# Altium PCB STM8 Oscillograph.PcbDoc (part 2 of 3)
Units mm, origin at the board's own origin, x right, y up, seen from the top; angles counter-clockwise.
Board outline 26.01 x 35.08 mm, 2 copper layers (Top Layer, Bottom Layer); 152 components, 126 nets, 536 pads, 88 vias.
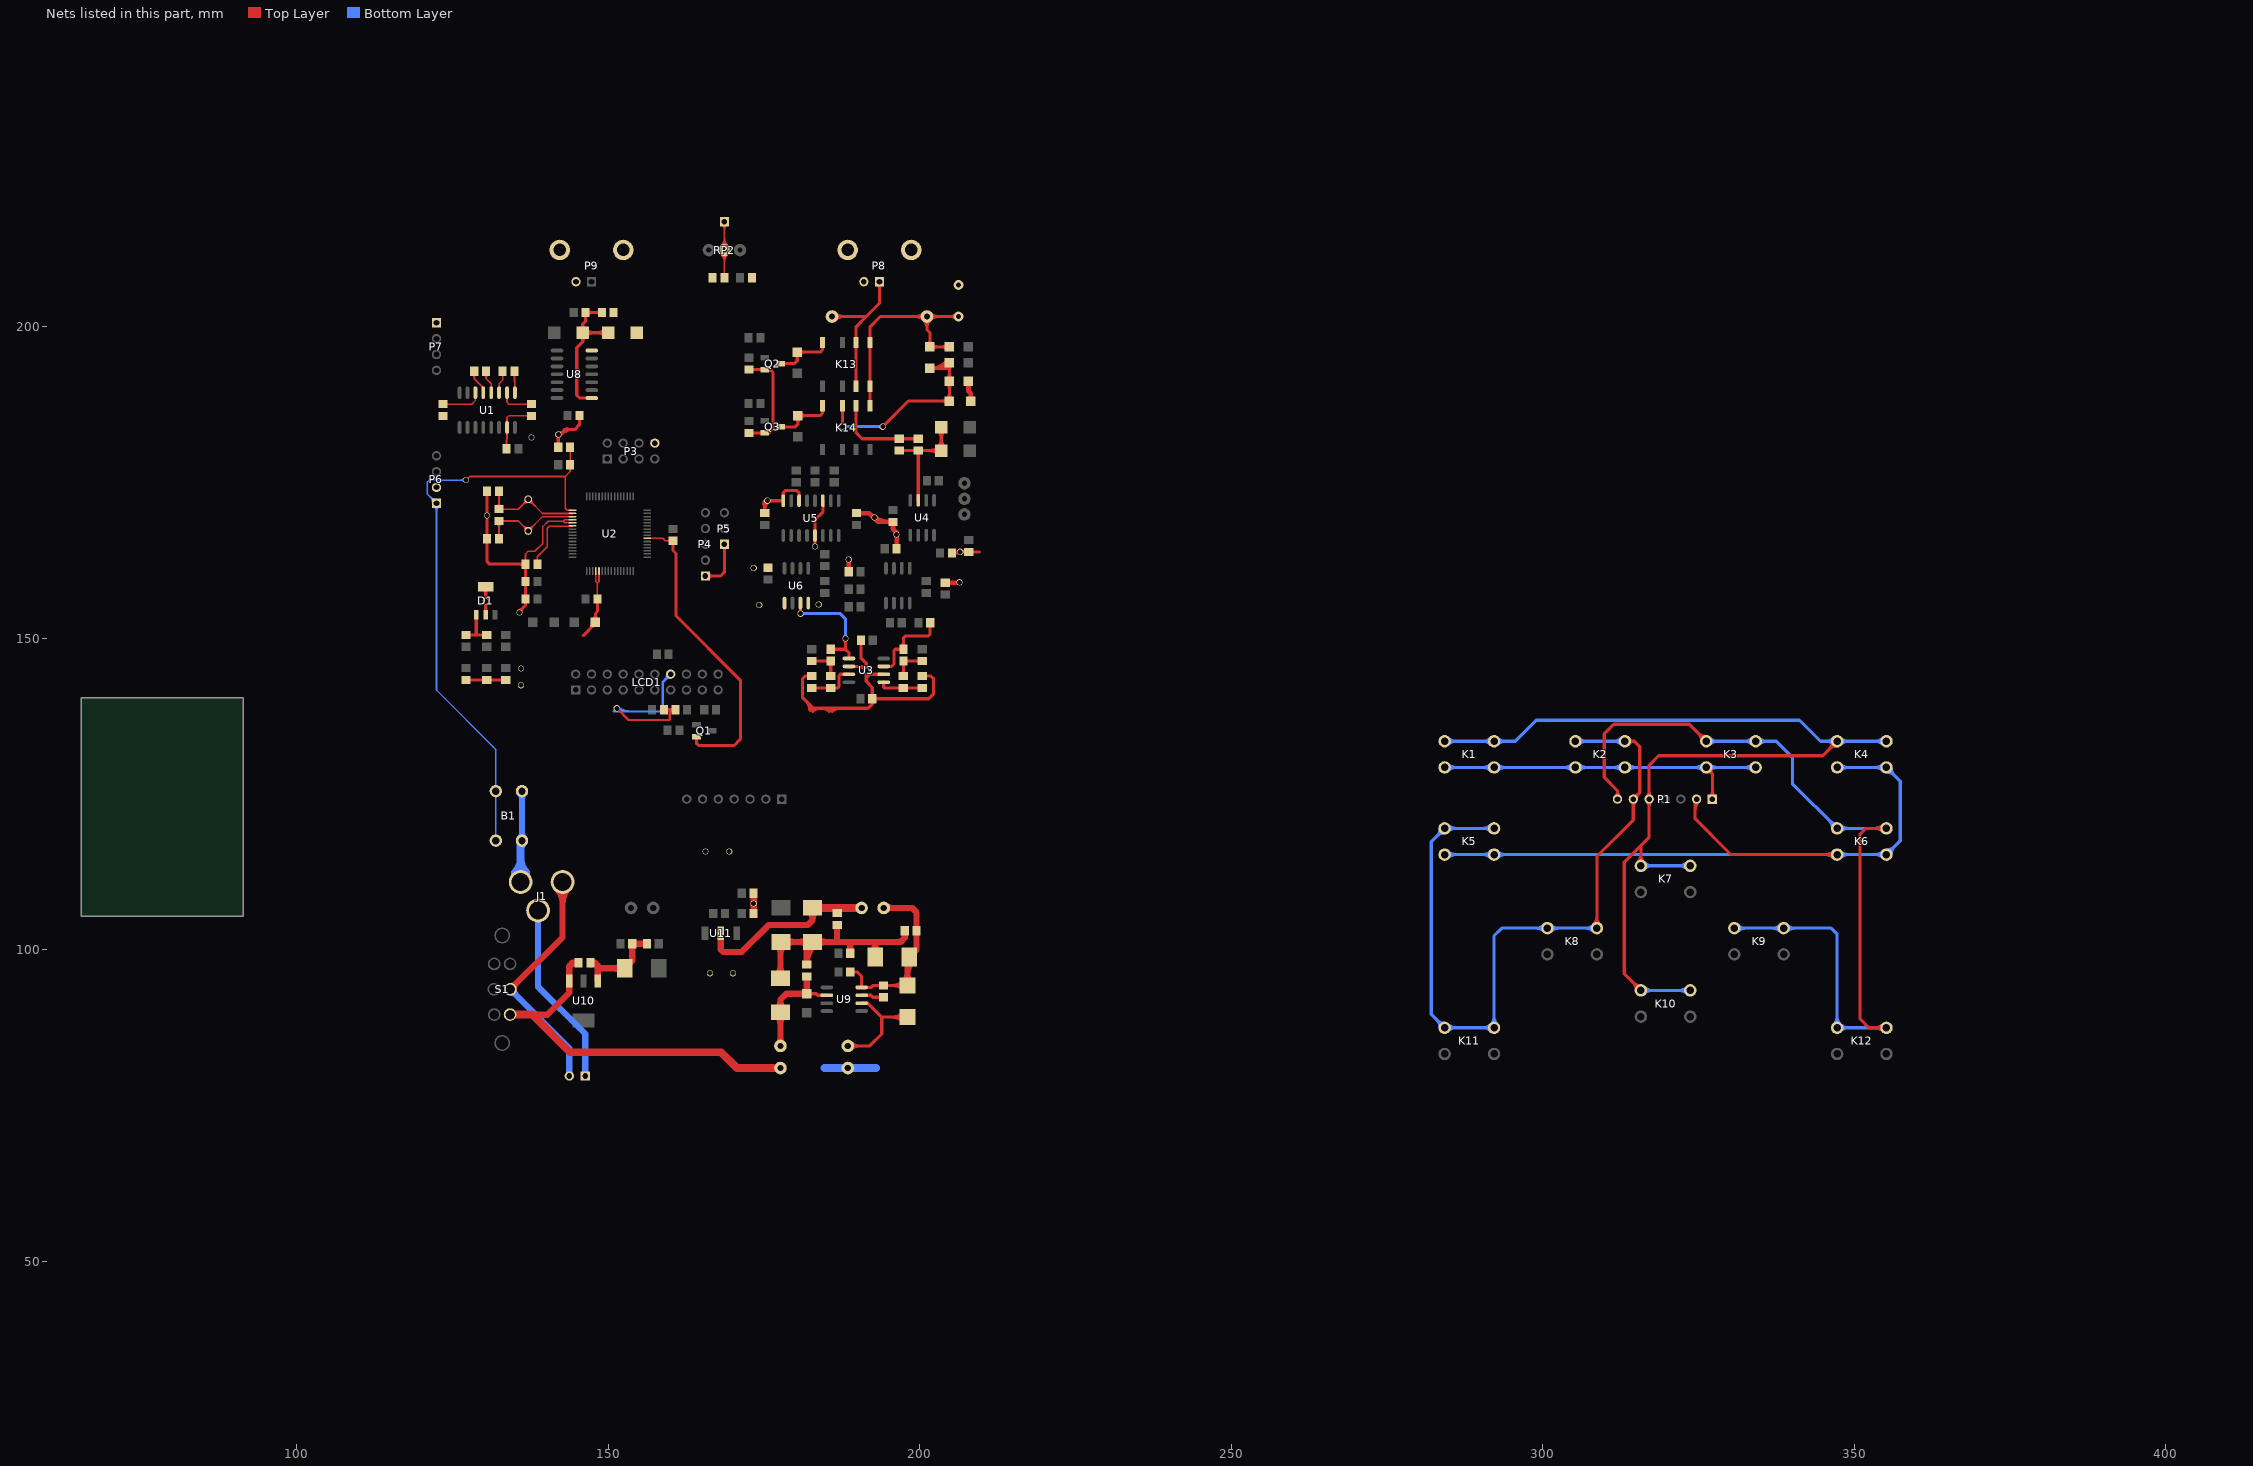
[diagram p2: the nets of this part, all layers, seen from the top]

## Via types
v1: diameter 1, hole 0.8, Top Layer to Bottom Layer, tented both sides, 88 vias

## Nets (pads, with @x,y where several pads share a name; then routed paths per layer and width w, separated by ;. In a path a pad name is that pad's centre, name@x,y a point inside that pad or via, vN(x,y) a via of type N, cw(c..) or ccw(c..) an arc to the next point about the centre after c; other vN are vias at no path point) (continued)
GND: B1.1 B1.4 C1.2 C2.1 C4.1 C5.2 C7.2 C8.2 C9.2 C10.1 C11.2 C12.2 C13.2 C14.2 C15.2 C16.2 C17.1 C18.2 C20.1 C21.1 C22.1 C24.1 C26.1 C27.1 C29.1 C30.1 C31.1 C32.1 C33.1 C34.1 C35.1 C36.2 C37.2 C38.2 C40.2 C41.2 C42.1 C43.2 C44.2 C45.1 C46.2 C47.1 C48.2 C49.1 C50.1 D1.2 D7.1 J1.2 L3.2 LCD1.14 P3.8 P4.1 P5.1 P6.2 P7.1 P8.2 P9.2 Q1.2 Q2.2 Q3.2 R4.2 R12.1 R16.1 R22.1 R28.2 R32.1 R36.1 R37.2 R39.1 R42.1 U1.15 U2.4 U2.5 U2.20 U2.21 U2.39 U3.2 U3.6 U5.3 U5.6 U5.8 U5.13 U6.1 U6.4 U8.7 U10.1 | length 448
  Top Layer w0.254: C7.2@133.67,180.467 133.67,182.006 133.756,182.093 133.756,185.471 134,185.715 C2.1@137.693,185.715 ; C10.1@136.718,161.861 136.718,163.564 137.136,163.982 138.227,163.982 139.522,165.278 139.522,167.97 140.36,168.808 142.773,168.808 ; U2.5@144.272,168.561 143.021,168.561 142.773,168.808 ; U2.4@144.272,169.061 143.026,169.061 142.773,168.808 ; U2.20@148.022,160.811 148.022,159.115 148.27,158.867 ; C12.2@148.27,156.337 148.27,158.867 ; U2.21@148.522,160.811 148.522,159.119 148.27,158.867 ; U2.39@156.272,166.061 158.754,166.061 159.141,165.674 C15.2@160.401,165.674
  Top Layer w0.381: v1@151.384,138.476 cw(c151.384,137.729) 151.912,138.257 cw(c152.441,138.786) v1@151.693,138.786 ; v1(151.384,138.786) 153.264,136.906 159.779,136.906 159.868,136.994 159.868,138.557 ; C18.2@158.938,138.557 C16.2@160.773,138.557 ; C18.2@159.263,138.232 cw(c160.047,137.448) 160.047,138.557 cw(c160.047,139.666) C18.2@159.263,138.882 ; C16.2@160.448,138.232 ccw(c159.664,137.448) 159.664,138.557 ccw(c159.664,139.666) C16.2@160.448,138.882
  Top Layer w0.508: R4.2@127.178,143.337 C1.2@133.528,143.337 ; D1.2@129.968,157.974 cw(c129.101,157.107) 130.327,157.107 cw(c131.554,157.107) D1.2@130.687,157.974 ; v1@130.179,155.782 cw(c129.82,155.423) 130.327,155.423 ; v1@130.179,156.13 ccw(c129.82,156.489) 130.327,156.489 ; D1.2@130.327,153.761 D1.2@130.327,158.333 ; 130.327,155.301 cw(c131.008,155.301) v1@130.527,155.782 ; 130.327,156.611 ccw(c131.008,156.611) v1@130.527,156.13 ; C8.2@130.561,173.609 130.561,162.326 130.962,161.925 C10.1@136.718,161.925 136.718,155.311 135.636,154.229 v1@135.636,154.495 ; v1@135.636,154.475 ccw(c135.636,155.069) 136.056,154.649 ccw(c136.476,154.229) v1@135.882,154.229 ; v1@136.009,154.178 cw(c137.032,154.178) 136.309,154.901 ; C10.1@136.438,161.645 ccw(c135.762,160.969) 135.762,161.925 ccw(c135.762,162.881) C10.1@136.438,162.205 ; v1@141.812,182.579 cw(c141.417,182.184) 141.976,182.184 ; C17.1@141.976,180.67 141.976,182.311 143.18,183.515 144.602,183.515 145.374,184.287 C34.1@145.374,185.776 ; 141.976,182.134 cw(c142.605,182.134) v1@142.16,182.579 ; v1@141.986,182.999 ccw(c141.986,184.635) 143.143,183.478 ; 142.934,183.515 cw(c142.34,183.515) 142.76,183.095 cw(c143.18,182.675) 143.18,183.269 ; 143.354,183.341 cw(c143.774,182.921) 143.774,183.515 cw(c143.774,184.109) 143.354,183.689 ; 145.974,150.444 147.955,152.425 147.955,154 148.27,154.315 C12.2@148.27,156.337 ; 146.951,151.421 ccw(c145.753,152.619) C11.2@147.447,152.619 ; C11.2@147.418,151.889 cw(c147.955,151.352) C11.2@147.955,152.111 ; C11.2@147.596,152.978 ccw(c146.729,153.845) 147.955,153.845 ccw(c149.181,153.845) C11.2@148.314,152.978 ; C15.2@160.401,165.674 160.401,164.109 160.884,163.627 160.884,153.645 171.221,143.307 171.221,133.833 170.205,132.817 164.516,132.817 164.16,133.172 Q1.2@164.16,134.239 ; Q1.2@164.025,134.104 cw(c163.7,133.779) 164.16,133.779 cw(c164.62,133.779) Q1.2@164.295,134.104 ; P4.1@165.608,160.02 168.046,160.02 168.656,160.63 P5.1@168.656,165.1 ; P4.1@165.959,159.669 cw(c166.805,158.823) 166.805,160.02 cw(c166.805,161.217) P4.1@165.959,160.371 ; R22.1@172.593,182.997 175.834,182.997 ; R12.1@172.593,193.157 175.123,193.157 Q2.2@175.133,193.167 175.997,193.167 176.454,192.71 176.454,183.617 175.834,182.997 ; 174.394,182.997 ccw(c174.394,183.492) Q3.2@174.744,183.142 ; 174.394,193.157 ccw(c174.394,193.652) Q2.2@174.744,193.302 ; C49.1@174.853,170.394 ccw(c174.177,171.07) 175.133,171.07 ccw(c176.089,171.07) C49.1@175.413,170.394 ; 174.948,171.889 cw(c175.482,171.355) v1@175.482,172.11 ; 174.959,171.53 cw(c174.539,171.11) 175.133,171.11 cw(c175.727,171.11) 175.307,171.53 cw(c176.708,170.129) 176.708,172.11 ; C49.1@175.133,170.114 175.133,171.704 ; C49.1@175.133,170.535 cw(c177.114,170.535) 175.713,171.936 cw(c176.133,171.517) 176.133,172.11 cw(c176.133,172.704) v1@175.713,172.284 ; 175.133,171.762 cw(c175.888,171.762) v1@175.354,172.296 ; Q3.2@175.133,182.997 Q3.2@175.133,183.007 ; v1@175.139,171.95 ccw(c175.152,172.498) v1(175.539,172.11) ; v1@175.293,172.105 cw(c174.745,172.092) 175.133,171.704 ; v1@175.379,171.71 cw(c175.927,171.723) v1(175.539,172.11) ; Q2.2@175.387,193.484 cw(c175.387,192.779) 175.886,193.278 ; Q2.2@175.472,192.997 cw(c175.794,192.354) 176.301,192.862 ; Q2.2@175.522,193.032 cw(c175.847,192.707) 175.847,193.167 cw(c175.847,193.627) Q2.2@175.522,193.302 ; Q3.2@175.529,183.134 ccw(c175.834,183.404) 175.834,182.997 ; v1@175.534,171.864 ccw(c175.521,171.316) 175.133,171.704 ; U5.6@180.645,172.11 180.645,173.38 180.289,173.736 178.41,173.736 178.105,173.431 U5.8@178.105,172.11 v1(175.539,172.11) ; 181.739,139.977 cw(c180.192,138.43) 182.38,138.43 ; 182.606,139.11 cw(c181.926,138.43) 182.888,138.43 ; C26.1@182.651,143.942 C26.1@182.651,143.952 ; 182.8,138.256 cw(c184.078,136.978) 184.078,138.786 ; C26.1@182.855,143.942 181.635,143.942 181.178,143.485 181.178,140.538 182.931,138.786 191.719,138.786 192.39,139.456 ; v1@183.011,164.918 ccw(c182.591,165.338) 183.185,165.338 ccw(c183.779,165.338) v1@183.359,164.918 ; v1(183.185,164.744) 183.185,169.012 184.455,170.282 U5.3@184.455,172.11 ; 184.272,138.786 cw(c184.272,136.978) 185.551,138.256 ; 185.899,138.256 cw(c187.177,136.978) 187.177,138.786 ; U3.2@188.646,145.517 190.678,145.517 v1@191.414,144.78 ; C21.1@190.566,149.733 190.566,146.873 191.414,146.025 191.414,143.104 192.39,142.128 192.39,139.456 ; 190.879,145.315 ccw(c191.516,145.952) v1@191.516,145.051 ; 191.414,143.688 191.973,144.247 U3.6@194.234,144.247 ; 191.414,143.966 cw(c192.355,143.966) v1@191.69,144.631 ; 191.414,145.645 ccw(c192.355,145.645) v1@191.69,144.979 ; C22.1@192.165,139.883 cw(c191.871,139.456) 192.39,139.456 ; C22.1@192.39,140.31 201.447,140.31 202.235,141.097 202.235,143.535 201.818,143.952 C27.1@200.431,143.952 ; C22.1@192.614,139.883 ccw(c192.908,139.456) 192.39,139.456 ; C22.1@192.67,140.03 cw(c193.346,139.354) 193.346,140.31 cw(c193.346,141.266) C22.1@192.67,140.59 ; C29.1@205.166,163.703 206.273,163.703 206.466,163.896 209.575,163.896 ; C29.1@205.418,163.703 ccw(c205.418,164.991) v1@206.328,164.08 ; C29.1@205.446,163.423 cw(c206.122,162.747) 206.122,163.703 cw(c206.122,164.659) C29.1@205.446,163.983 ; v1@206.676,163.732 cw(c207.071,163.337) 207.071,163.896 ; v1@206.676,164.08 ccw(c207.121,164.525) 207.121,163.896 ; 175.133,171.704 v1(175.539,172.11)
  Top Layer w0.762: R32.1@188.61,160.68 v1(188.61,162.651) ; C50.1@189.865,170.114 191.887,170.114 193.279,168.722 C30.1@195.707,168.722 195.707,167.589 196.301,166.995 C33.1@196.301,164.389 ; 192.254,169.747 ccw(c192.761,170.254) v1@192.761,169.537 ; v1@192.845,169.502 ccw(c194.728,171.386) 194.728,168.722 ; v1@192.88,169.418 ccw(c193.596,169.418) 193.089,168.911 ; 195.872,167.424 cw(c195.123,166.675) v1@196.182,166.675 ; C32.1@204.089,158.938 v1@206.365,158.938 ; R16.1@207.553,191.018 cw(c206.903,190.368) 207.823,190.368 cw(c208.743,190.368) R16.1@208.092,191.018 ; R16.1@207.823,191.287 207.823,189.713 208.204,189.331 C24.1@208.204,188.112 ; C24.1@207.935,188.381 ccw(c207.284,189.032) 208.204,189.032 ccw(c209.124,189.032) C24.1@208.474,188.381
  Top Layer w1.016: C38.2@147.127,97.917 147.879,97.917 148.336,97.46 U10.1@148.336,94.996 ; C38.2@147.187,97.688 cw(c147.605,96.791) 148.305,97.491 ; 148.387,97.028 C40.2@152.651,97.028 153.858,98.235 C44.2@153.858,100.965 C41.2@156.215,100.965 ; C40.2@152.126,96.503 ccw(c150.86,95.237) 150.86,97.028 ccw(c150.86,98.819) C40.2@152.126,97.553 ; R42.1@173.34,105.842 C48.2@173.34,109.093 ; C36.2@177.123,95.955 ccw(c175.856,97.222) 177.648,97.222 ccw(c179.439,97.222) C36.2@178.172,95.955 ; C47.1@177.199,100.745 cw(c176.116,99.662) 177.648,99.662 ; C36.2@177.648,95.431 C47.1@177.648,101.194 ; 177.648,99.294 cw(c179.699,99.294) C47.1@178.248,100.745 ; C47.1@177.724,101.27 C45.1@182.804,101.27 196.926,101.27 197.602,101.945 C43.2@197.602,103.048 ; C47.1@178.498,100.745 cw(c179.765,99.478) 179.765,101.27 cw(c179.765,103.061) C47.1@178.498,101.794 ; 180.762,101.27 ccw(c180.762,103.062) C45.1@182.029,101.795 ; 180.763,101.27 cw(c180.763,99.479) C45.1@182.029,100.745 ; C37.2@181.864,97.648 C45.1@181.864,100.33 ; C37.2@181.864,97.813 cw(c186.011,97.813) C45.1@183.079,100.745 ; C45.1@183.579,100.745 cw(c184.845,99.479) 184.845,101.27 cw(c184.845,103.061) C45.1@183.579,101.795 ; 186.741,101.346 C46.2@186.741,104.003 ; 188.773,101.27 188.859,101.184 R39.1@188.859,99.441 ; C42.1@192.312,99.631 ccw(c191.045,100.898) 192.837,100.898 ccw(c194.628,100.898) C42.1@193.361,99.631 ; C42.1@192.837,98.857 192.837,101.245
  Bottom Layer w0.381: 150.876,138.278 158.318,138.278 158.775,138.735 158.775,143.027 LCD1.14@160.02,144.272 LCD1.14@159.868,144.272 ; v1@151.064,138.466 ccw(c151.518,138.92) 151.518,138.278 ; v1@151.333,138.735 ccw(c152.438,139.839) 152.438,138.278 ; v1@151.603,139.004 ccw(c153.358,140.759) 153.358,138.278 ; LCD1.14@159.461,144.272 cw(c158.11,144.272) 159.065,143.317 cw(c160.02,142.362) LCD1.14@160.02,143.713
  Bottom Layer w1.016: B1.4@135.812,117.894 ccw(c134.972,118.734) 136.16,118.734 ccw(c137.348,118.734) B1.4@136.508,117.894 ; B1.1@135.812,125.128 cw(c134.972,124.288) 136.16,124.288 cw(c137.348,124.288) B1.1@136.508,125.128 ; B1.4@136.16,117.546 B1.1@136.16,125.476
  Bottom Layer w1.27: J1.2@135.043,112.429 ccw(c132.875,114.597) 135.941,114.597 ccw(c139.007,114.597) J1.2@136.839,112.429 ; J1.2@135.941,110.896 135.941,117.327 B1.4@136.16,117.546 ; 135.941,116.136 cw(c137.57,116.136) B1.4@136.418,117.288 ; 184.734,81.026 192.989,81.026
  other v1: 166.319,96.266 170.028,96.266 173.355,107.442 165.608,115.773 169.418,115.773 136,142.494 191.516,144.805 136,145.161 135.763,154.178 174.244,155.346 183.794,155.448 130.353,155.956 206.375,159.004 173.355,161.29 206.502,163.906 196.301,166.675 192.761,169.418 130.561,169.723 137.668,182.245 141.986,182.753
NetB1_2: B1.2 B1.3 C17.2 P6.1 R6.2 U2.1 | length 106.3
  Top Layer w0.254: v1(127.178,175.412) 127.762,175.997 143.104,175.997 ; R6.2@143.575,177.348 cw(c143.167,176.769) 143.876,176.769 ; C17.2@143.876,180.67 143.876,176.769 ; R6.2@144.177,177.348 ccw(c144.584,176.769) 143.876,176.769 ; U2.1@144.272,170.561 143.434,170.561 143.104,170.891 143.104,175.997 ; 143.104,175.997 143.876,176.769
  Bottom Layer w0.254: P6.1@121.805,171.704 ccw(c120.301,171.704) 121.364,172.768 ccw(c122.428,173.831) P6.1@122.428,172.327 ; P6.1@121.987,171.263 cw(c120.924,170.2) 122.428,170.2 cw(c123.932,170.2) P6.1@122.869,171.263 ; P6.1@122.059,171.704 ccw(c121.168,171.704) 121.798,172.334 ccw(c122.428,172.964) P6.1@122.428,172.073 ; P6.1@122.167,171.443 cw(c121.537,170.813) 122.428,170.813 cw(c123.319,170.813) P6.1@122.689,171.443 ; v1@126.914,175.149 ccw(c126.277,174.512) 126.277,175.412 ccw(c126.277,176.313) v1@126.914,175.676 ; v1(127.178,175.412) 121.285,175.412 120.98,175.108 120.98,173.152 P6.1@122.428,171.704 122.428,141.707 131.953,132.182 B1.3@131.953,117.546
NetC2_2: C2.2 U1.2 | length 5.6
  Top Layer w0.254: U1.2@133.756,189.459 133.756,187.909 134.051,187.615 C2.2@137.693,187.615
NetC3_1: C3.1 U1.1 | length 3.5
  Top Layer w0.254: C3.1@134.96,192.888 134.96,191.252 135.026,191.186 U1.1@135.026,189.459
NetC3_2: C3.2 U1.3 | length 3.7
  Top Layer w0.254: U1.3@132.486,189.459 132.486,190.932 133.06,191.506 C3.2@133.06,192.888
NetC4_2: C4.2 U1.6 | length 6.7
  Top Layer w0.254: C4.2@123.469,187.615 128.077,187.615 128.676,188.214 U1.6@128.676,189.459
NetC6_1: C6.1 U1.4 | length 5.3
  Top Layer w0.254: C6.1@130.065,192.377 cw(c129.538,191.709) 130.388,191.709 ; C6.1@130.388,192.888 130.388,191.709 ; C6.1@130.712,192.377 ccw(c131.239,191.709) 130.388,191.709 ; U1.4@131.216,189.459 131.216,190.881 130.388,191.709
NetC6_2: C6.2 U1.5 | length 5.6
  Top Layer w0.254: C6.2@128.163,192.378 cw(c127.627,191.704) 128.488,191.704 ; C6.2@128.488,192.888 128.488,191.704 ; C6.2@128.814,192.378 ccw(c129.349,191.704) 128.488,191.704 ; U1.5@129.946,189.459 129.946,190.246 128.488,191.704
NetC8_1: C8.1 R5.2 U2.2 X1.2 | length 22.1
  Top Layer w0.254: R5.2@132.091,171.119 ccw(c131.198,172.012) 132.461,172.012 ccw(c133.724,172.012) R5.2@132.831,171.119 ; C8.1@132.461,173.609 R5.2@132.461,170.749 135.57,170.749 X1.2@137.16,172.339 139.438,170.061 U2.2@144.272,170.061 ; X1.2@136.652,172.339 cw(c135.426,172.339) 136.293,171.472 cw(c137.16,170.605) 137.16,171.831 cw(c137.16,170.605) 138.027,171.472 cw(c138.894,172.339) X1.2@137.668,172.339
NetC9_1: C9.1 R5.1 U2.3 X1.1 | length 22.1
  Top Layer w0.254: R5.1@132.091,168.479 cw(c131.198,167.586) 132.461,167.586 cw(c133.724,167.586) R5.1@132.831,168.479 ; C9.1@132.461,165.989 R5.1@132.461,168.849 135.57,168.849 X1.1@137.16,167.259 139.462,169.561 U2.3@144.272,169.561 ; X1.1@136.652,167.259 ccw(c135.426,167.259) 136.293,168.126 ccw(c137.16,168.993) 137.16,167.767 ccw(c137.16,168.993) 138.027,168.126 ccw(c138.894,167.259) X1.1@137.668,167.259
NetC10_2: C10.2 U2.6 | length 10.6
  Top Layer w0.254: C10.2@138.618,161.925 138.618,163.129 140.208,164.719 140.208,167.691 140.538,168.021 144.232,168.021 U2.6@144.272,168.061
NetC19_1: C19.1 K13.3 K13.6 P8.1 | length 28.6
  Top Layer w0.508: C19.1@185.928,201.676 191.44,201.676 ; C19.1@186.467,201.137 cw(c187.768,199.836) 187.768,201.676 cw(c187.768,203.516) C19.1@186.467,202.215 ; K13.3@189.804,190.5 K13.6@189.804,197.5 189.804,200.04 191.44,201.676 ; P8.1@193.197,206.913 cw(c192.351,206.067) 193.548,206.067 cw(c194.745,206.067) P8.1@193.899,206.913 ; P8.1@193.548,207.264 193.548,203.784 191.44,201.676
NetC19_2: C19.2 C20.2 K13.4 K13.5 K14.5 R14.2 VC1.2 | length 55.4
  Top Layer w0.508: K13.4@192.004,190.5 K14.5@192.004,187.34 K13.5@192.004,197.5 192.004,199.98 193.7,201.676 C19.2@201.168,201.676 ; C19.2@200.629,202.215 cw(c199.328,203.516) 199.328,201.676 cw(c199.328,199.836) 200.629,201.137 cw(c199.328,199.836) 201.168,199.836 cw(c203.008,199.836) 201.707,201.137 cw(c203.008,199.836) 203.008,201.676 cw(c203.008,203.516) C19.2@201.707,202.215 ; VC1.2@201.292,197.158 ccw(c200.425,198.025) 201.651,198.025 ccw(c202.877,198.025) 202.01,197.158 ccw(c202.877,198.025) 202.877,196.799 ccw(c202.878,195.573) VC1.2@202.01,196.44 ; R14.2@204.416,196.44 ccw(c203.548,195.573) 203.548,196.799 ccw(c203.548,198.026) R14.2@204.416,197.158 ; R14.2@204.775,196.799 VC1.2@201.651,196.799 201.651,199.059 201.168,199.542 C19.2@201.168,201.676 ; C20.2@205.871,201.299 ccw(c204.96,200.388) 204.96,201.676 ccw(c204.96,202.964) C20.2@205.871,202.053 ; C20.2@206.248,201.676 C19.2@201.168,201.676
NetC23_1: C23.1 R11.2 U3.7 | length 15.2
  Top Layer w0.508: U3.7@194.234,145.517 195.504,145.517 195.885,145.898 195.885,148.057 196.098,148.27 C23.1@197.383,148.27 197.383,150.038 197.714,150.368 201.346,150.368 201.676,150.698 201.676,152.507 R11.2@201.696,152.527 ; C23.1@197.103,148.65 ccw(c196.427,149.326) 197.383,149.326 ccw(c198.339,149.326) C23.1@197.663,148.65
NetC23_2: C23.2 R18.2 R20.1 | length 7
  Top Layer w0.508: R18.2@197.103,144.232 ccw(c196.427,144.908) 197.383,144.908 ccw(c198.339,144.908) R18.2@197.663,144.232 ; R18.2@197.383,143.952 C23.2@197.383,146.37 R20.1@200.431,146.37
NetC24_2: C24.2 K14.7 R15.1 R16.2 VC1.1 | length 53.5
  Top Layer w0.508: v1@187.43,184.172 ccw(c187.01,184.592) 187.604,184.592 ccw(c188.198,184.592) v1@187.778,184.172 ; v1(187.604,183.998) K14.7@187.604,187.34 ; v1(194.082,183.998) 198.196,188.112 C24.2@204.775,188.112 R15.1@204.775,194.259 cw(c202.787,196.037) 202.787,193.37 ; v1@194.082,184.244 ccw(c194.082,184.837) 194.502,184.418 ccw(c194.922,183.998) v1@194.328,183.998 ; VC1.1@202.01,193.011 cw(c202.877,192.144) 202.877,193.37 cw(c202.877,194.596) VC1.1@202.01,193.729 ; 203.548,188.112 cw(c203.548,186.885) C24.2@204.416,187.753 ; 203.55,188.112 ccw(c203.55,189.337) 204.416,188.471 ccw(c203.55,189.337) 204.775,189.337 ; 203.923,193.37 ccw(c203.923,195.021) R15.1@205.153,193.921 ; R15.1@204.396,194.598 cw(c201.651,197.052) VC1.1@201.651,193.37 204.724,193.37 ; R16.2@204.416,190.928 cw(c203.548,190.061) 204.775,190.061 cw(c206.001,190.061) R16.2@205.134,190.928 ; R16.2@204.416,191.647 ccw(c203.548,192.514) 204.775,192.514 ccw(c206.001,192.514) R16.2@205.134,191.647 ; R15.1@204.416,193.9 cw(c203.548,193.033) 204.775,193.033 cw(c206.001,193.033) R15.1@205.134,193.9 ; 204.775,189.339 ccw(c206.003,189.339) C24.2@205.134,188.471
  Bottom Layer w0.508: v1(187.604,183.998) v1(194.082,183.998) ; v1@187.778,183.824 cw(c188.198,183.404) 188.198,183.998 cw(c188.198,184.592) v1@187.778,184.172 ; v1@193.908,183.824 ccw(c193.488,183.404) 193.488,183.998 ccw(c193.488,184.592) v1@193.908,184.172
NetC25_1: C25.1 U3.1 U6.3 | length 21.9
  Top Layer w0.508: v1@180.674,154.149 ccw(c180.254,154.569) 180.848,154.569 ccw(c181.442,154.569) v1@181.022,154.149 ; v1(180.848,153.975) U6.3@180.848,155.677 ; C25.1@185.724,148.27 188.072,148.27 ; v1@187.898,149.798 cw(c187.478,149.378) 188.072,149.378 cw(c188.666,149.378) v1@188.246,149.798 ; v1(188.072,149.972) 188.072,148.27 ; U3.1@188.646,146.787 188.646,147.696 188.072,148.27
  Bottom Layer w0.508: v1(180.848,153.975) 187.249,153.975 188.072,153.152 v1(188.072,149.972) ; v1@181.022,153.801 cw(c181.442,153.381) 181.442,153.975 cw(c181.442,154.569) v1@181.022,154.149 ; v1@187.898,150.146 ccw(c187.478,150.566) 188.072,150.566 ccw(c188.666,150.566) v1@188.246,150.146
NetC25_2: C25.2 R17.2 R19.1 | length 7
  Top Layer w0.508: R19.1@182.651,146.37 C25.2@185.724,146.37 R17.2@185.724,143.952 ; C25.2@185.444,145.99 cw(c184.768,145.314) 185.724,145.314 cw(c186.68,145.314) C25.2@186.004,145.99
NetC26_2: C26.2 R17.1 U3.3 | length 7.9
  Top Layer w0.508: C26.2@182.651,142.052 R17.1@185.724,142.052 186.832,142.052 187.046,142.265 187.046,144.043 187.249,144.247 U3.3@188.646,144.247
NetC27_2: C27.2 R18.1 U3.5 | length 7.1
  Top Layer w0.508: U3.5@194.234,142.977 194.234,142.113 194.295,142.052 R18.1@197.383,142.052 C27.2@200.431,142.052
NetC28_1: C28.1 D4.1 D5.2 R21.1 U4.3 | length 28.6
  Top Layer w0.508: C28.1@196.723,180.152 R21.1@199.771,180.152 ; R21.1@199.491,179.872 cw(c198.815,179.196) 199.771,179.196 cw(c200.727,179.196) R21.1@200.051,179.872 ; U4.3@199.771,172.161 R21.1@199.771,180.152 ; D4.1@202.915,179.613 ccw(c201.614,178.312) 201.614,180.152 ccw(c201.614,181.992) 202.915,180.691 ccw(c201.614,181.992) 203.454,181.992 ccw(c205.294,181.992) D4.1@203.993,180.691 ; D5.2@202.915,183.357 cw(c201.614,182.056) 203.454,182.056 cw(c205.294,182.056) D5.2@203.993,183.357 ; D5.2@203.454,183.896 D4.1@203.454,180.152 R21.1@199.771,180.152
NetC28_2: C28.2 K14.6 R21.2 | length 14.7
  Top Layer w0.508: K14.6@189.804,187.34 189.804,182.992 190.744,182.052 C28.2@196.723,182.052 R21.2@199.771,182.052
NetC35_2: C35.2 P10.1 RP2.2 | length 24.1
  Top Layer w0.254: RP2.2@168.039,211.727 cw(c166.548,210.236) 168.656,210.236 cw(c170.764,210.236) RP2.2@169.273,211.727 ; RP2.2@168.039,212.961 ccw(c166.548,214.452) 168.656,214.452 ccw(c170.764,214.452) RP2.2@169.273,212.961 ; P10.1@168.215,216.475 cw(c167.152,215.412) 168.656,215.412 cw(c170.16,215.412) P10.1@169.097,216.475 ; RP2.2@168.218,211.906 cw(c167.162,210.85) 168.656,210.85 cw(c170.15,210.85) RP2.2@169.094,211.906 ; RP2.2@168.218,212.782 ccw(c167.162,213.838) 168.656,213.838 ccw(c170.15,213.838) RP2.2@169.094,212.782 ; P10.1@168.395,216.655 cw(c167.765,216.025) 168.656,216.025 cw(c169.547,216.025) P10.1@168.917,216.655 ; C35.2@168.656,207.899 P10.1@168.656,216.916
NetC36_1: C36.1 C37.1 L2.2 R38.1 U9.6 | length 27.6
  Top Layer w0.508: R38.1@181.864,92.964 183.388,92.964 183.642,92.71 U9.6@185.09,92.71 ; R38.1@182.223,92.605 cw(c183.09,91.738) 183.09,92.964 cw(c183.09,94.19) R38.1@182.223,93.323
  Top Layer w1.016: C36.1@177.123,89.442 cw(c175.855,88.174) 177.648,88.174 ; C36.1@177.123,90.491 ccw(c175.855,91.759) 177.648,91.759 ; L2.2@177.289,84.941 ccw(c176.422,85.808) 177.648,85.808 ccw(c178.874,85.808) L2.2@178.007,84.941 ; L2.2@177.648,84.582 177.648,91.999 178.613,92.964 R38.1@181.864,92.964 C37.1@181.864,95.748 ; 177.648,88.176 cw(c179.438,88.176) C36.1@178.172,89.442 ; 177.648,91.757 ccw(c179.438,91.757) C36.1@178.172,90.491
NetC38_1: C38.1 L2.1 S1.3 U10.3 | length 61.8
  Top Layer w1.016: 137.795,89.611 140.208,89.611 143.736,93.139 143.736,97.381 144.272,97.917 C38.1@145.227,97.917 ; 143.795,97.44 cw(c144.772,96.462) C38.1@145.185,97.781
  Top Layer w1.27: S1.3@134.239,89.611 137.795,89.611 143.84,83.566 168.123,83.566 170.663,81.026 L2.1@177.648,81.026
NetC39_1: C39.1 U9.3 | length 3.6
  Top Layer w0.508: U9.3@190.678,92.71 192.151,92.71 192.466,92.395 C39.1@194.183,92.395
NetC39_2: C39.2 C42.2 C43.1 D8.1 L5.1 R40.2 U9.4 | length 41.5
  Top Layer w0.508: R40.2@188.859,96.444 189.967,96.444 190.678,95.733 U9.4@190.678,93.98 192.227,93.98 192.542,94.295 D8.1@198.034,94.295 ; R40.2@189.139,96.164 cw(c189.815,95.488) 189.815,96.444 cw(c189.815,97.4) R40.2@189.139,96.724 ; 195.566,94.295 cw(c195.566,91.807) D8.1@197.325,93.566 ; 195.616,94.295 ccw(c195.616,96.713) D8.1@197.325,95.003
  Top Layer w1.016: L5.1@194.234,106.734 198.777,106.734 199.502,106.009 199.502,100.058 198.034,98.59 D8.1@198.034,94.295 ; L5.1@194.593,106.375 cw(c195.46,105.508) 195.46,106.734 cw(c195.46,107.96) L5.1@194.593,107.093 ; D8.1@197.505,94.824 ccw(c196.229,96.1) 198.034,96.1 ; 198.034,96.149 ccw(c199.908,96.149) D8.1@198.583,94.824 ; 198.034,96.17 cw(c200.737,96.17) C42.2@198.825,98.082
NetC45_2: C45.2 C46.1 L5.2 U11.2 | length 35.4
  Top Layer w1.016: U11.2@168.071,102.692 168.071,100.051 168.453,99.67 171.425,99.67 175.743,103.988 182.042,103.988 182.804,104.75 C45.2@182.804,106.734 ; C45.2@182.279,106.209 cw(c181.013,104.943) 182.804,104.943 cw(c184.595,104.943) C45.2@183.329,106.209
  Top Layer w1.27: C45.2@182.804,106.734 L5.2@190.678,106.734 ; C45.2@183.489,106.299 cw(c184.539,105.249) 184.539,106.734 cw(c184.539,108.219) C45.2@183.489,107.169 ; C46.1@186.741,105.903 186.741,106.709
NetD1_1: D1.1 R2.2 R3.1 | length 6.4
  Top Layer w0.508: R3.1@127.178,150.571 R2.2@130.48,150.571 ; 128.827,150.621 D1.1@128.827,153.761
NetD2_1: D2.1 K13.8 Q2.3 | length 14.2
  Top Layer w0.508: Q2.3@177.673,194.119 179.87,194.119 180.34,194.589 D2.1@180.34,195.961 184.048,195.961 184.404,196.317 K13.8@184.404,197.5 ; Q2.3@178.062,193.985 cw(c178.387,193.66) 178.387,194.119 cw(c178.387,194.579) Q2.3@178.062,194.254 ; D2.1@179.981,195.602 cw(c179.114,194.735) 180.34,194.735 cw(c181.566,194.735) 180.699,195.602 cw(c181.566,194.735) 181.566,195.961 cw(c181.566,197.187) D2.1@180.699,196.32
NetD3_1: D3.1 K14.8 Q3.3 | length 14.2
  Top Layer w0.508: Q3.3@177.673,183.959 180.022,183.959 180.442,184.379 D3.1@180.442,185.776 184.023,185.776 184.404,186.157 K14.8@184.404,187.34 ; Q3.3@178.062,183.825 cw(c178.387,183.5) 178.387,183.959 cw(c178.387,184.419) Q3.3@178.062,184.094 ; D3.1@180.082,185.416 cw(c179.215,184.549) 180.442,184.549 cw(c181.668,184.549) 180.801,185.416 cw(c181.668,184.549) 181.668,185.776 cw(c181.668,187.002) D3.1@180.801,186.135
NetD6_1: D6.1 D7.2 R35.2 R36.2 U8.1 | length 35.6
  Top Layer w0.508: D6.1@145.501,198.425 cw(c144.977,197.637) 145.923,197.637 ; D6.1@145.501,199.694 ccw(c144.977,200.482) 145.923,200.482 ; D6.1@145.923,199.06 D7.2@149.987,199.06 ; D6.1@146.345,198.425 ccw(c146.869,197.637) 145.923,197.637 ; D6.1@146.345,199.694 cw(c146.869,200.482) 145.923,200.482 ; D6.1@146.462,198.521 cw(c147.763,197.22) 147.763,199.06 cw(c147.763,200.899) D6.1@146.462,199.599 ; R35.2@146.645,202.031 cw(c147.321,201.355) 147.321,202.311 cw(c147.321,203.267) R35.2@146.645,202.591 ; U8.1@147.371,188.595 145.415,188.595 144.958,189.052 144.958,196.672 145.923,197.637 ; R36.2@148.691,202.031 ccw(c148.015,201.355) 148.015,202.311 ccw(c148.015,203.267) R36.2@148.691,202.591 ; R36.2@148.971,202.311 R35.2@146.365,202.311 146.365,200.924 145.923,200.482 ; D7.2@149.448,198.521 ccw(c148.147,197.22) 148.147,199.06 ccw(c148.147,200.899) D7.2@149.448,199.599 ; 145.923,197.637 145.923,200.482
NetD8_2: D8.2 L3.1 U9.2 | length 24
  Top Layer w0.508: L3.1@188.468,84.582 191.999,84.582 193.904,86.487 193.904,89.205 ; L3.1@189.007,84.043 cw(c190.308,82.742) 190.308,84.582 cw(c190.308,86.422) L3.1@189.007,85.121 ; U9.2@190.678,91.44 191.668,91.44 193.904,89.205 ; D8.2@197.325,88.486 ccw(c195.591,86.752) 195.591,89.205 ccw(c195.591,91.658) D8.2@197.325,89.923 ; D8.2@198.044,89.205 193.904,89.205
NetJ1_1: J1.1 J2.2 S1.1 | length 47.7
  Top Layer w1.016: S1.1@134.302,93.675 142.672,102.044 J1.1@142.672,110.896 ; S1.1@134.302,94.183 ccw(c134.302,95.41) 135.17,94.542 ccw(c136.037,93.675) S1.1@134.81,93.675 ; J1.1@141.684,109.909 cw(c139.299,107.524) 142.672,107.524 cw(c146.044,107.524) J1.1@143.66,109.909
  Bottom Layer w1.016: S1.1@134.302,93.167 cw(c134.302,91.941) 135.17,92.808 cw(c136.037,93.675) S1.1@134.81,93.675 ; S1.1@134.302,93.675 143.764,84.214 J2.2@143.764,79.756
NetJ1_3: J1.3 J2.1 | length 29.7
  Bottom Layer w1.016: J1.3@138.735,106.324 138.735,94.107 146.304,86.538 J2.1@146.304,79.756
NetK1_1: K1.1 K1.4 K2.1 K2.4 K3.1 K3.4 P1.1 | length 87.4
  Top Layer w0.508: K3.4@326.28,129.287 327.266,128.301 ; K3.4@326.426,128.555 cw(c326.608,127.643) 327.266,128.301 ; P1.1@326.915,124.557 ccw(c326.069,125.403) 327.266,125.403 ccw(c328.463,125.403) P1.1@327.617,124.557 ; K3.4@327.012,129.141 ccw(c327.924,128.959) 327.266,128.301 ; P1.1@327.266,124.206 327.266,128.301
  Bottom Layer w0.508: K1.4@284.28,129.287 K3.1@334.21,129.287 ; K1.4@284.808,128.76 cw(c286.081,127.486) 286.081,129.287 cw(c286.081,131.088) K1.4@284.808,129.815 ; K1.1@291.682,128.76 ccw(c290.409,127.486) 290.409,129.287 ccw(c290.409,131.088) K1.1@291.682,129.815 ; K1.1@292.737,128.76 cw(c294.011,127.486) 294.011,129.287 cw(c294.011,131.088) K1.1@292.737,129.815 ; K2.4@304.753,128.76 ccw(c303.479,127.486) 303.479,129.287 ccw(c303.479,131.088) K2.4@304.753,129.815 ; K2.4@305.808,128.76 cw(c307.081,127.486) 307.081,129.287 cw(c307.081,131.088) K2.4@305.808,129.815 ; K2.1@312.682,128.76 ccw(c311.409,127.486) 311.409,129.287 ccw(c311.409,131.088) K2.1@312.682,129.815 ; K2.1@313.737,128.76 cw(c315.011,127.486) 315.011,129.287 cw(c315.011,131.088) K2.1@313.737,129.815 ; K3.4@325.753,128.76 ccw(c324.479,127.486) 324.479,129.287 ccw(c324.479,131.088) K3.4@325.753,129.815 ; K3.4@326.808,128.76 cw(c328.081,127.486) 328.081,129.287 cw(c328.081,131.088) K3.4@326.808,129.815 ; K3.1@333.682,128.76 ccw(c332.409,127.486) 332.409,129.287 ccw(c332.409,131.088) K3.1@333.682,129.815
NetK1_2: K1.2 K1.3 K4.2 K4.3 K7.2 K7.3 K10.2 K10.3 P1.5 | length 204.1
  Top Layer w0.508: K10.3@315.034,93.494 ccw(c313.233,93.494) 314.507,94.767 ccw(c315.78,96.041) K10.3@315.78,94.24 ; K7.3@315.253,114.022 ccw(c313.979,115.295) 315.78,115.295 ccw(c317.581,115.295) K7.3@316.308,114.022 ; K10.3@315.78,93.494 313.106,96.168 313.106,114.097 317.106,118.097 317.106,129.654 318.618,131.166 344.952,131.166 K4.3@347.28,133.494 ; K7.3@315.78,113.494 315.78,116.771 ; P1.5@316.755,123.855 cw(c315.909,123.009) 317.106,123.009 cw(c318.303,123.009) P1.5@317.457,123.855 ; P1.5@316.755,124.557 ccw(c315.909,125.403) 317.106,125.403 ccw(c318.303,125.403) P1.5@317.457,124.557 ; K4.3@346.534,133.494 cw(c344.733,133.494) 346.007,132.221 cw(c347.28,130.947) K4.3@347.28,132.748
  Bottom Layer w0.508: K1.3@284.28,133.494 295.622,133.494 298.983,136.855 341.249,136.855 344.61,133.494 K4.2@355.21,133.494 ; K1.3@284.808,132.967 cw(c286.081,131.693) 286.081,133.494 cw(c286.081,135.295) K1.3@284.808,134.022 ; K1.2@291.682,132.967 ccw(c290.409,131.693) 290.409,133.494 ccw(c290.409,135.295) K1.2@291.682,134.022 ; K1.2@292.737,132.967 cw(c294.011,131.693) 294.011,133.494 cw(c294.011,135.295) K1.2@292.737,134.022 ; K10.3@315.78,93.494 K10.2@323.71,93.494 ; K7.3@315.78,113.494 K7.2@323.71,113.494 ; K10.3@316.308,92.966 cw(c317.581,91.693) 317.581,93.494 cw(c317.581,95.295) K10.3@316.308,94.021 ; K7.3@316.308,112.967 cw(c317.581,111.693) 317.581,113.494 cw(c317.581,115.295) K7.3@316.308,114.022 ; K10.2@323.182,92.966 ccw(c321.909,91.693) 321.909,93.494 ccw(c321.909,95.295) K10.2@323.182,94.021 ; K7.2@323.182,112.967 ccw(c321.909,111.693) 321.909,113.494 ccw(c321.909,115.295) K7.2@323.182,114.022 ; K4.3@346.753,132.967 ccw(c345.479,131.693) 345.479,133.494 ccw(c345.479,135.295) K4.3@346.753,134.022 ; K4.3@347.808,132.967 cw(c349.081,131.693) 349.081,133.494 cw(c349.081,135.295) K4.3@347.808,134.022 ; K4.2@354.683,132.967 ccw(c353.409,131.693) 353.409,133.494 ccw(c353.409,135.295) K4.2@354.683,134.022
NetK2_2: K2.2 K2.3 K5.2 K5.3 K8.2 K8.3 K11.2 K11.3 P1.6 | length 166.8
  Top Layer w0.508: K8.2@308.183,104.021 ccw(c306.909,105.295) 308.71,105.295 ccw(c310.511,105.295) K8.2@309.238,104.021 ; K8.2@308.71,103.494 308.71,114.984 314.566,120.84 P1.6@314.566,124.206 315.595,125.235 315.595,132.639 314.74,133.494 ; K2.2@313.21,133.494 314.74,133.494 ; K2.2@313.798,133.035 cw(c314.74,132.299) 314.74,133.494 ; K2.2@313.798,133.953 ccw(c314.74,134.689) 314.74,133.494 ; P1.6@314.215,123.855 cw(c313.369,123.009) 314.566,123.009 cw(c315.763,123.009) P1.6@314.917,123.855 ; P1.6@314.566,124.702 ccw(c314.566,125.899) 315.413,125.053 ccw(c316.259,124.206) P1.6@315.062,124.206
  Bottom Layer w0.508: K11.3@283.534,87.494 ccw(c281.733,87.494) 283.007,88.768 ccw(c284.28,90.041) K11.3@284.28,88.24 ; K5.3@283.534,119.507 cw(c281.733,119.507) 283.007,118.234 cw(c284.28,116.96) K5.3@284.28,118.761 ; K11.3@284.808,86.967 cw(c286.081,85.693) 286.081,87.494 cw(c286.081,89.295) K11.3@284.808,88.022 ; K5.3@284.808,118.979 cw(c286.081,117.706) 286.081,119.507 cw(c286.081,121.308) K5.3@284.808,120.035 ; K11.2@291.682,86.967 ccw(c290.409,85.693) 290.409,87.494 ccw(c290.409,89.295) 291.682,88.022 ccw(c290.409,89.295) 292.21,89.295 ccw(c294.011,89.295) K11.2@292.737,88.022 ; K5.2@291.682,118.979 ccw(c290.409,117.706) 290.409,119.507 ccw(c290.409,121.308) K5.2@291.682,120.035 ; K5.2@292.21,119.507 K5.3@284.28,119.507 282.118,117.345 282.118,89.656 K11.3@284.28,87.494 K11.2@292.21,87.494 292.21,102.243 293.461,103.494 K8.2@308.71,103.494 ; K8.3@300.252,102.966 ccw(c298.979,101.693) 298.979,103.494 ccw(c298.979,105.295) K8.3@300.252,104.021 ; K8.3@301.307,102.966 cw(c302.581,101.693) 302.581,103.494 cw(c302.581,105.295) K8.3@301.307,104.021 ; K2.3@305.28,133.494 K2.2@313.21,133.494 ; K2.3@305.808,132.967 cw(c307.081,131.693) 307.081,133.494 cw(c307.081,135.295) K2.3@305.808,134.022 ; K8.2@308.183,102.966 ccw(c306.909,101.693) 306.909,103.494 ccw(c306.909,105.295) K8.2@308.183,104.021 ; K2.2@312.682,132.967 ccw(c311.409,131.693) 311.409,133.494 ccw(c311.409,135.295) K2.2@312.682,134.022
NetK3_2: K3.2 K3.3 K6.2 K6.3 K9.2 K9.3 K12.2 K12.3 P1.7 | length 190
  Top Layer w0.508: P1.7@311.675,124.557 ccw(c310.829,125.403) 312.026,125.403 ccw(c313.223,125.403) P1.7@312.377,124.557 ; P1.7@312.026,124.206 312.026,125.565 309.905,127.686 309.905,134.671 311.455,136.22 323.554,136.22 K3.3@326.28,133.494 ; K3.3@325.534,133.494 ccw(c323.733,133.494) 325.007,134.768 ccw(c326.28,136.041) K3.3@326.28,134.24 ; K12.2@354.683,86.967 ccw(c353.409,85.693) 353.409,87.494 ccw(c353.409,89.295) K12.2@354.683,88.022 ; K6.2@354.683,118.979 ccw(c353.409,117.706) 353.409,119.507 ccw(c353.409,121.308) K6.2@354.683,120.035 ; K12.2@355.21,87.494 352.374,87.494 350.952,88.916 350.952,118.567 351.892,119.507 K6.2@355.21,119.507
  Bottom Layer w0.508: K3.3@326.28,133.494 337.524,133.494 340.106,130.912 340.106,126.681 K6.3@347.28,119.507 K6.2@355.21,119.507 ; K3.3@326.808,132.967 cw(c328.081,131.693) 328.081,133.494 cw(c328.081,135.295) K3.3@326.808,134.022 ; K9.3@330.78,103.494 346.315,103.494 347.28,102.529 K12.3@347.28,87.494 K12.2@355.21,87.494 ; K9.3@331.307,102.966 cw(c332.581,101.693) 332.581,103.494 cw(c332.581,105.295) K9.3@331.307,104.021 ; K3.2@333.682,132.967 ccw(c332.409,131.693) 332.409,133.494 ccw(c332.409,135.295) K3.2@333.682,134.022 ; K3.2@334.738,132.967 cw(c336.011,131.693) 336.011,133.494 cw(c336.011,135.295) K3.2@334.738,134.022 ; K9.2@338.183,102.966 ccw(c336.909,101.693) 336.909,103.494 ccw(c336.909,105.295) K9.2@338.183,104.021 ; K9.2@339.238,102.966 cw(c340.511,101.693) 340.511,103.494 cw(c340.511,105.295) K9.2@339.238,104.021 ; K6.3@346.534,119.507 ccw(c344.733,119.507) 346.007,120.78 ccw(c347.28,122.054) K6.3@347.28,120.253 ; K12.3@346.753,88.022 ccw(c345.479,89.295) 347.28,89.295 ccw(c349.081,89.295) 347.808,88.022 ccw(c349.081,89.295) 349.081,87.494 ccw(c349.081,85.693) K12.3@347.808,86.967 ; K6.3@347.808,118.979 cw(c349.081,117.706) 349.081,119.507 cw(c349.081,121.308) K6.3@347.808,120.035 ; K12.2@354.683,86.967 ccw(c353.409,85.693) 353.409,87.494 ccw(c353.409,89.295) K12.2@354.683,88.022 ; K6.2@354.683,118.979 ccw(c353.409,117.706) 353.409,119.507 ccw(c353.409,121.308) K6.2@354.683,120.035
NetK4_1: K4.1 K4.4 K5.1 K5.4 K6.1 K6.4 P1.2 | length 155.9
  Top Layer w0.508: 324.485,122.427 cw(c326.505,122.427) P1.2@325.077,123.855 ; P1.2@324.485,124.384 324.485,121.056 330.241,115.3 K6.4@347.28,115.3 ; K6.4@346.753,114.772 ccw(c345.479,113.499) 345.479,115.3 ccw(c345.479,117.101) K6.4@346.753,115.827
  Bottom Layer w0.508: K5.4@284.28,115.3 K6.1@355.21,115.3 357.429,117.519 357.429,127.068 K4.1@355.21,129.287 K4.4@347.28,129.287 ; K5.4@284.808,114.772 cw(c286.081,113.499) 286.081,115.3 cw(c286.081,117.101) K5.4@284.808,115.827 ; K5.1@291.682,114.772 ccw(c290.409,113.499) 290.409,115.3 ccw(c290.409,117.101) K5.1@291.682,115.828 ; K5.1@292.737,114.772 cw(c294.011,113.499) 294.011,115.3 cw(c294.011,117.101) K5.1@292.737,115.828 ; K6.4@346.753,114.772 ccw(c345.479,113.499) 345.479,115.3 ccw(c345.479,117.101) K6.4@346.753,115.827 ; K6.4@347.808,114.772 cw(c349.081,113.499) 349.081,115.3 cw(c349.081,117.101) K6.4@347.808,115.827 ; K4.4@347.808,128.76 cw(c349.081,127.486) 349.081,129.287 cw(c349.081,131.088) K4.4@347.808,129.815 ; K6.1@354.683,114.772 ccw(c353.409,113.499) 353.409,115.3 ccw(c353.409,117.101) K6.1@354.683,115.828 ; K4.1@354.683,128.76 ccw(c353.409,127.486) 353.409,129.287 ccw(c353.409,131.088) K4.1@354.683,129.815 ; K6.1@355.21,116.046 ccw(c355.21,117.847) 356.484,116.574 ccw(c357.757,115.3) K6.1@355.956,115.3 ; K4.1@355.21,128.541 cw(c355.21,126.74) 356.484,128.014 cw(c357.757,129.287) K4.1@355.956,129.287